# EAGLE board Lab Controller Board v04 (EAGLE 7.5.0)
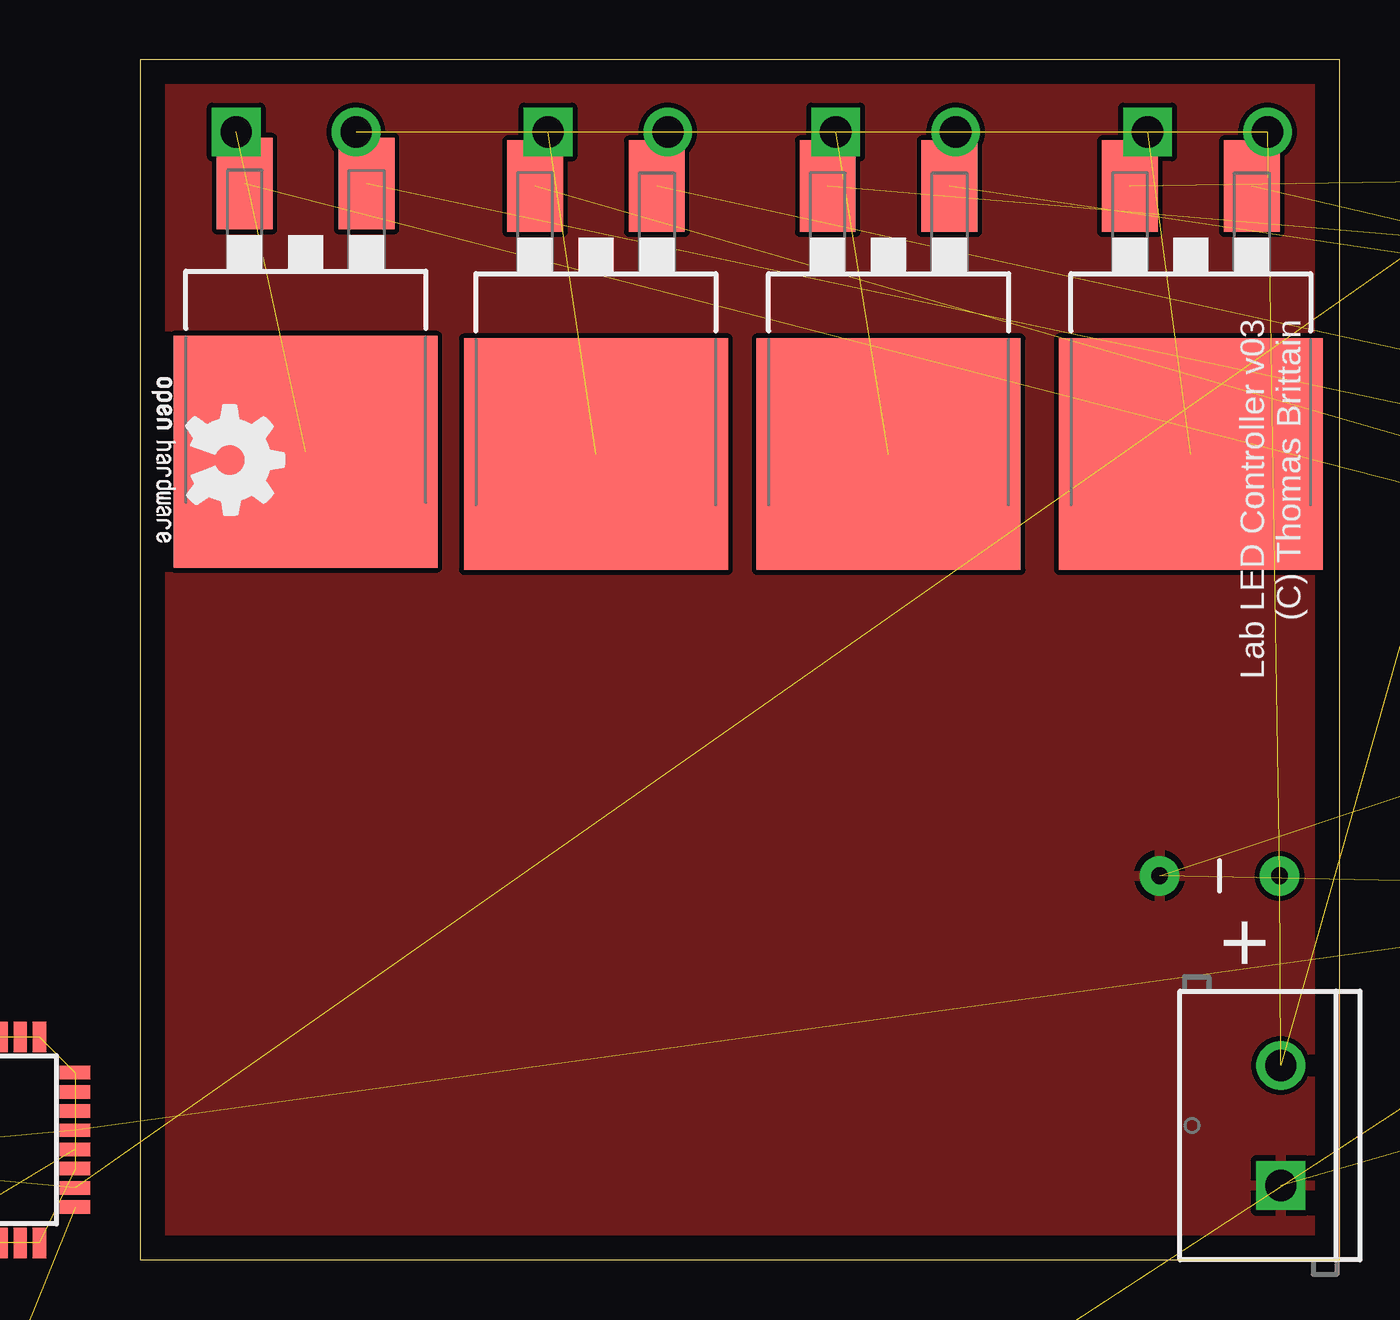
[diagram p0: board, top side]
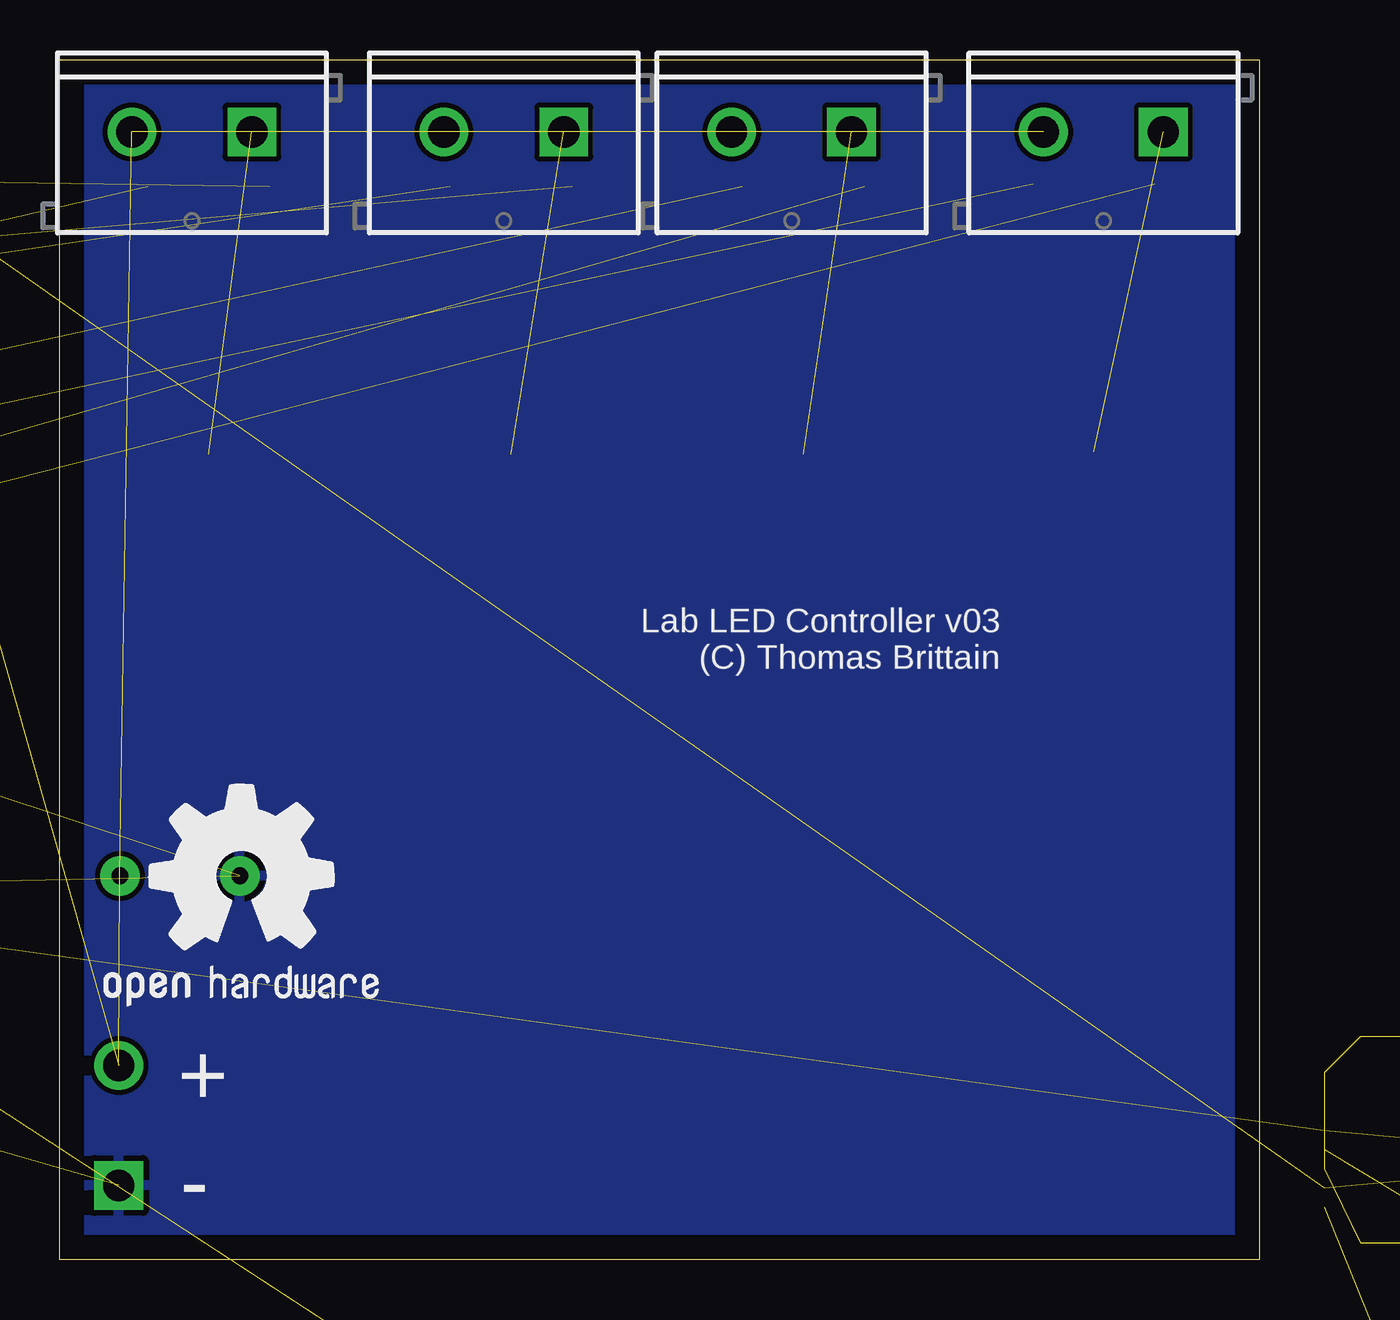
[diagram p1: board, bottom side, seen from below]

Size 50 x 50 mm. Coordinates in mm from the lower left corner, seen from the top.
Outline: 0,0 50,0 50,50 0,50 0,0
Copper layers (1*16): Top 0.035mm / dielectric 1.5mm / Bottom 0.035mm
Design rules "default *": minimum track width 10mil, minimum drill 24mil, track to track 8mil, track to pad 8mil, pad to pad 8mil, via to via 8mil, smd to smd 8mil, copper to edge 40mil, drill to drill 8mil, minimum pad ring 10mil, minimum via ring 8mil, stop-mask expansion 4mil, vias tented up to drill 1.0064mm, thermal gap 10mil

## Footprints (pad centres in the part's own frame; a part is rotated, then mirrored left to right if it is on the bottom)
CAP-PTH-5MM = drill 0.7 pad 1.651: 1 -2.5,0; 2 2.5,0
EIA3528 = smd 1.2 x 2.5: A 1.65,0; C -1.65,0
C0402 = smd 0.7 x 0.9: 1 -0.65,0; 2 0.65,0
TO-263/D2PAK = smd 2.32 x 3.81: 1 -2.54,-7.045; 3 2.54,-7.045 | smd 11 x 9.65: 2 0,4.125
USB-B-MICRO-SMD_V03 = smd 1.45 x 0.4: D+ 2.725,0; D- 2.725,0.65; GND 2.725,-1.3; ID 2.725,-0.65; VBUS 2.725,1.3 | smd 1.5 x 1.8: SHIELD1 0,3.685; SHIELD2 0,-3.685 | smd 1.5 x 2.5: SHIELD3 0,0 | hole 0.85: 2.2,1.9; 2.2,-1.9
SCREWTERMINAL-5MM-2 = drill 1.3 pad 2.032 square: 1 0,0 | drill 1.3 pad 2.032: 2 5,0
1X12 = drill 1.016 pad 1.88: 1 0,0; 2 2.54,0; 3 5.08,0; 4 7.62,0; 5 10.16,0; 6 12.7,0; 7 15.24,0; 8 17.78,0; 9 20.32,0; 10 22.86,0; 11 25.4,0; 12 27.94,0
1X02_LOCK = drill 1.016 pad 1.88: 1 -0.178,0; 2 2.718,0
LED-TRICOLOR-5050 = smd 2 x 1.1: 1 -2.4,1.7; 2 -2.4,0; 3 -2.4,-1.7; 4 2.4,-1.7; 5 2.4,0; 6 2.4,1.7
DPAK = smd 1.6 x 3: 1 -2.28,-5.31; 3 2.28,-5.31 | smd 4.826 x 5.715: 4 0,1.588
HC49UP = smd 5.334 x 1.93: 1 -4.826,0; 2 4.826,0
SOT23-3 = smd 0.8 x 0.9: 1 -0.95,-1; 2 0.95,-1; 3 0,1.1
R0805W = smd 1.5 x 1: 1 -1.052,0; 2 1.052,0
0411V = drill 0.914 octagon: 1 -2.54,0; 2 1.27,0
M0805 = smd 1.3 x 1.6: 1 -0.95,0; 2 0.95,0
R0402 = smd 0.7 x 0.9: 1 -0.65,0; 2 0.65,0
TACTILE-SWITCH-SMD = smd 1.524 x 0.762: 1 -2.794,1.905; 2 2.794,1.905; 3 -2.794,-1.905; 4 2.794,-1.905
STAND-OFF = hole 3.302: 0,0
TQFP32-08 = smd 1.27 x 0.559: 1 -4.293,2.8; 2 -4.293,2; 3 -4.293,1.2; 4 -4.293,0.4; 5 -4.293,-0.4; 6 -4.293,-1.2; 7 -4.293,-2; 8 -4.293,-2.8; 17 4.293,-2.8; 18 4.293,-2; 19 4.293,-1.2; 20 4.293,-0.4; 21 4.293,0.4; 22 4.293,1.2; 23 4.293,2; 24 4.293,2.8 | smd 0.559 x 1.27: 9 -2.8,-4.293; 10 -2,-4.293; 11 -1.2,-4.293; 12 -0.4,-4.293; 13 0.4,-4.293; 14 1.2,-4.293; 15 2,-4.293; 16 2.8,-4.293; 25 2.8,4.293; 26 2,4.293; 27 1.2,4.293; 28 0.4,4.293; 29 -0.4,4.293; 30 -1.2,4.293; 31 -2,4.293; 32 -2.8,4.293
SOIC16 = smd 0.635 x 1.524: 1 -4.445,-2.695; 2 -3.175,-2.695; 3 -1.905,-2.695; 4 -0.635,-2.695; 5 0.635,-2.695; 6 1.905,-2.695; 7 3.175,-2.695; 8 4.445,-2.695; 9 4.445,2.695; 10 3.175,2.695; 11 1.905,2.695; 12 0.635,2.695; 13 -0.635,2.695; 14 -1.905,2.695; 15 -3.175,2.695; 16 -4.445,2.695
RESONATOR-SMD = smd 0.45 x 1.905: 1 -1.2,0; 2 0,0; 3 1.2,0

## Placement (x,y rotation side)
C1  big  [CAP-PTH-5MM]  45,16 180 top
C2  10uF  [EIA3528]  -16,0 0 top  (outside the outline)
C3  0.1uF  [C0402]  -18,-5 0 top  (outside the outline)
C4  0.1uF  [C0402]  -18,-10 0 top  (outside the outline)
C5  0.1uF  [C0402]  -18,-25 0 top  (outside the outline)
C6  22pF  [C0402]  -27,-58 0 top  (outside the outline)
C7  22pF  [C0402]  -27,-63 0 top  (outside the outline)
FQP30N06L  100A/100V  [TO-263/D2PAK]  19,37.7 180 top
GOLD_ORB_SM1  OSHWLOGO_GOLD_ORB_MED  [OSHW1]  48.8,8.85 0 bottom
GOLD_ORB_SM2  OSHWLOGO_GOLD_ORB_SM  [OSHW2]  -0.55,37.15 270 top
J1  [USB-B-MICRO-SMD_V03]  -24,-40 0 top  (outside the outline)
JP1  [SCREWTERMINAL-5MM-2]  47.55,3.1 90 top
JP2  [SCREWTERMINAL-5MM-2]  17,47 180 bottom
JP3  [SCREWTERMINAL-5MM-2]  29,47 180 bottom
JP4  [SCREWTERMINAL-5MM-2]  42,47 180 bottom
JP5  [SCREWTERMINAL-5MM-2]  4,47 180 bottom
JP6  [1X12]  60.65,6.25 90 top  (outside the outline)
JP7  [1X12]  66.35,34.2 270 top  (outside the outline)
JP8  [1X02_LOCK]  77,16 90 top  (outside the outline)
LED1  LED-TRICOLOR-5050NO_IC  [LED-TRICOLOR-5050]  87.35,8.3 90 top  (outside the outline)
MC7805CD2TR4  V_REG_MC33269DT  [DPAK]  66.05,52.3 90 bottom  (outside the outline)
Q1  [HC49UP]  -21,-70 0 top  (outside the outline)
Q2  MMBT5088  [SOT23-3]  92.31,29.45 90 top  (outside the outline)
Q3  100A/100V  [TO-263/D2PAK]  6.9,37.8 180 top
Q4  MMBT5088  [SOT23-3]  81.4,29.75 90 top  (outside the outline)
Q5  100A/100V  [TO-263/D2PAK]  43.8,37.7 180 top
Q6  MMBT5088  [SOT23-3]  90.75,33.3 0 top  (outside the outline)
Q7  100A/100V  [TO-263/D2PAK]  31.2,37.7 180 top
Q8  MMBT5088  [SOT23-3]  94.85,35.85 90 top  (outside the outline)
R1  100k  [R0805W]  67.43,53.06 270 top  (outside the outline)
R2  .75Ohm  [0411V]  85.03,22.43 270 top  (outside the outline)
R3  100k  [R0805W]  70.15,53.25 270 top  (outside the outline)
R4  .75Ohm  [0411V]  91.8,19.7 270 top  (outside the outline)
R5  100k  [R0805W]  62.55,53.1 270 top  (outside the outline)
R6  .75Ohm  [0411V]  88.05,45.4 0 top  (outside the outline)
R7  100k  [R0805W]  64.85,53.1 270 top  (outside the outline)
R8  .75Ohm  [0411V]  86.95,37.2 270 top  (outside the outline)
R9  4.7k  [M0805]  73,19 180 top  (outside the outline)
R10  4.7k  [M0805]  73,15.8 180 top  (outside the outline)
R11  100k  [R0805W]  89.05,14 270 top  (outside the outline)
R12  100k  [R0805W]  85.65,14 270 top  (outside the outline)
R13  100k  [R0805W]  87.35,14 270 top  (outside the outline)
R14  10k  [R0402]  -18,-30 0 top  (outside the outline)
R15  330  [R0402]  -18,-34 0 top  (outside the outline)
R16  1k  [R0402]  -27,-48 0 top  (outside the outline)
R17  1k  [R0402]  -27,-53 0 top  (outside the outline)
S1  TAC_SWITCHSMD  [TACTILE-SWITCH-SMD]  -16,-20 0 top  (outside the outline)
STANDOFF1  STAND-OFF  [STAND-OFF]  77.5,35.25 0 top  (outside the outline)
STANDOFF2  STAND-OFF  [STAND-OFF]  56,50 180 top  (outside the outline)
U1  ATMEGA328P_TQFP  [TQFP32-08]  -7,5 0 top
U2  CH340G  [SOIC16]  -13,-42 0 top  (outside the outline)
Y1  16MHZ  [RESONATOR-SMD]  -17,-15 0 top  (outside the outline)

## Library data of the parts
C1 = SparkFun-Passives
C2 = SparkFun-Capacitors
C3-C7 R1-R17 = resistor
FQP30N06L Q3 Q5 Q7 = SparkFun-DiscreteSemi; PROD_ID: TRANS-12437
GOLD_ORB_SM1 GOLD_ORB_SM2 = bfl
J1 = SparkFun-Connectors; PROD_ID: CONN-11752
JP1-JP5 = SparkFun-Connectors; STOREFRONT_ID: PRT-08432
JP6-JP8 = SparkFun-Connectors
LED1 = SparkFun-LED
MC7805CD2TR4 = SparkFun-PowerIC
Q1 = crystal; OC_FARNELL: unknown; OC_NEWARK: unknown
Q2 Q4 Q6 Q8 = SparkFun-DiscreteSemi; PROD_ID: TRANS-11160
S1 = SparkFun-Retired; PROD_ID: SWCH-08247
STANDOFF1 STANDOFF2 = SparkFun-Electromechanical
U1 = SparkFun-DigitalIC; PROD_ID: IC-09069
U2 = usb-serial
Y1 = SparkFun-FreqCtrl; PROD_ID: XTAL-08900

## Nets
5V: J1.VBUS R9.2 R10.2 U2.16
9: JP6.2
12V: C1.1 JP1.2 JP2.2 JP3.2 JP4.2 JP5.2 MC7805CD2TR4.3
APM_PIN_3: JP6.7 R3.1
APM_PIN_5: JP6.5 R1.1
APM_PIN_6: JP6.4 R7.1
APM_PIN_9: JP6.1 R5.1
D+: J1.D+ U2.5
D-: J1.D- U2.6
DTR: C5.1 U2.13
FET_SOURCE: FQP30N06L.3 Q2.1 R2.1
FET_SOURCE1: Q3.3 Q4.1 R4.1
FET_SOURCE2: Q5.3 Q6.1 R6.1
FET_SOURCE3: Q7.3 Q8.1 R8.1
GND: C1.2 C2.C C3.2 C4.2 C6.2 C7.2 J1.GND J1.ID J1.SHIELD1 J1.SHIELD2 J1.SHIELD3 JP1.1 MC7805CD2TR4.1 Q2.2 Q4.2 Q6.2 Q8.2 R2.2 R4.2 R6.2 R8.2 R11.1 R12.1 R13.1 S1.1 S1.2 U1.3 U1.5 U1.21 U2.1 Y1.2
LED_DRAIN: FQP30N06L.2 JP2.1
LED_DRAIN1: JP5.1 Q3.2
LED_DRAIN2: JP4.1 Q5.2
LED_DRAIN3: JP3.1 Q7.2
N$1: C3.1 U1.20
N$2: U1.7 Y1.1
N$3: JP6.10
N$4: JP6.9
N$5: JP6.8 LED1.3
N$6: LED1.4 R11.2
N$7: JP6.6 LED1.1
N$8: LED1.6 R12.2
N$9: LED1.5 R13.2
N$10: JP6.3
N$11: U1.8 Y1.3
N$12: JP7.1 JP7.2 JP7.3 JP7.4 JP7.5 JP7.6 JP7.7 JP7.8 JP7.9 JP7.10 JP7.11 JP7.12
N$13: C5.2 R14.1 S1.3 S1.4 U1.29
N$14: R15.2 U1.17
N$15: U1.1 U1.2 U1.9 U1.10 U1.11 U1.12 U1.13 U1.14 U1.15 U1.16 U1.19 U1.22 U1.23 U1.24 U1.25 U1.26 U1.27 U1.28 U1.30 U1.31 U1.32
N$30: U2.9 U2.10 U2.11 U2.12 U2.14 U2.15
N$32: C6.1 C7.1 Q1.1 Q1.2 U2.4 U2.7 U2.8
POWER_LED: LED1.2 R15.1
PWM_B: FQP30N06L.1 Q2.3 R1.2
PWM_B1: Q3.1 Q4.3 R3.2
PWM_B2: Q5.1 Q6.3 R5.2
PWM_B3: Q7.1 Q8.3 R7.2
RX: JP6.11
SCL: JP8.1 R10.1
SDA: JP8.2 R9.1
TX: JP6.12
U2_RX: R17.2 U2.3
U2_TX: R16.2 U2.2
VCC: C2.A C4.1 MC7805CD2TR4.4 R14.2 U1.4 U1.6 U1.18

## Tracks (layer width: path | path; a pad name or v marks a point on that pad's centre or on a via)
5V  (3 unrouted)
12V  (6 unrouted)
APM_PIN_3  (1 unrouted)
APM_PIN_5  (1 unrouted)
APM_PIN_6  (1 unrouted)
APM_PIN_9  (1 unrouted)
D+  (1 unrouted)
D-  (1 unrouted)
DTR  (1 unrouted)
FET_SOURCE  (2 unrouted)
FET_SOURCE1  (2 unrouted)
FET_SOURCE2  (2 unrouted)
FET_SOURCE3  (2 unrouted)
GND  (30 unrouted)
  pour Bottom: -1,51 51,51 51,-2 -1,-2
  pour Top: -1,51 51,51 51,-2 -1,-2
LED_DRAIN  (1 unrouted)
LED_DRAIN1  (1 unrouted)
LED_DRAIN2  (1 unrouted)
LED_DRAIN3  (1 unrouted)
N$1  (1 unrouted)
N$2  (1 unrouted)
N$5  (1 unrouted)
N$6  (1 unrouted)
N$7  (1 unrouted)
N$8  (1 unrouted)
N$9  (1 unrouted)
N$11  (1 unrouted)
N$12  (11 unrouted)
N$13  (4 unrouted)
N$14  (1 unrouted)
N$15  (20 unrouted)
N$30  (5 unrouted)
N$32  (6 unrouted)
POWER_LED  (1 unrouted)
PWM_B  (2 unrouted)
PWM_B1  (2 unrouted)
PWM_B2  (2 unrouted)
PWM_B3  (2 unrouted)
SCL  (1 unrouted)
SDA  (1 unrouted)
U2_RX  (1 unrouted)
U2_TX  (1 unrouted)
VCC  (6 unrouted)

## Text on the board
tNames: 100k | 100k | 4.7k | 100k | Lab LED Controller v03 / (C) Thomas Brittain | 4.7k | + | 100k
bNames: Lab LED Controller v03 / (C) Thomas Brittain | MC7805CD2TR4 | + | -